# EAGLE board ATtinyBoard_3 (EAGLE 6.4)
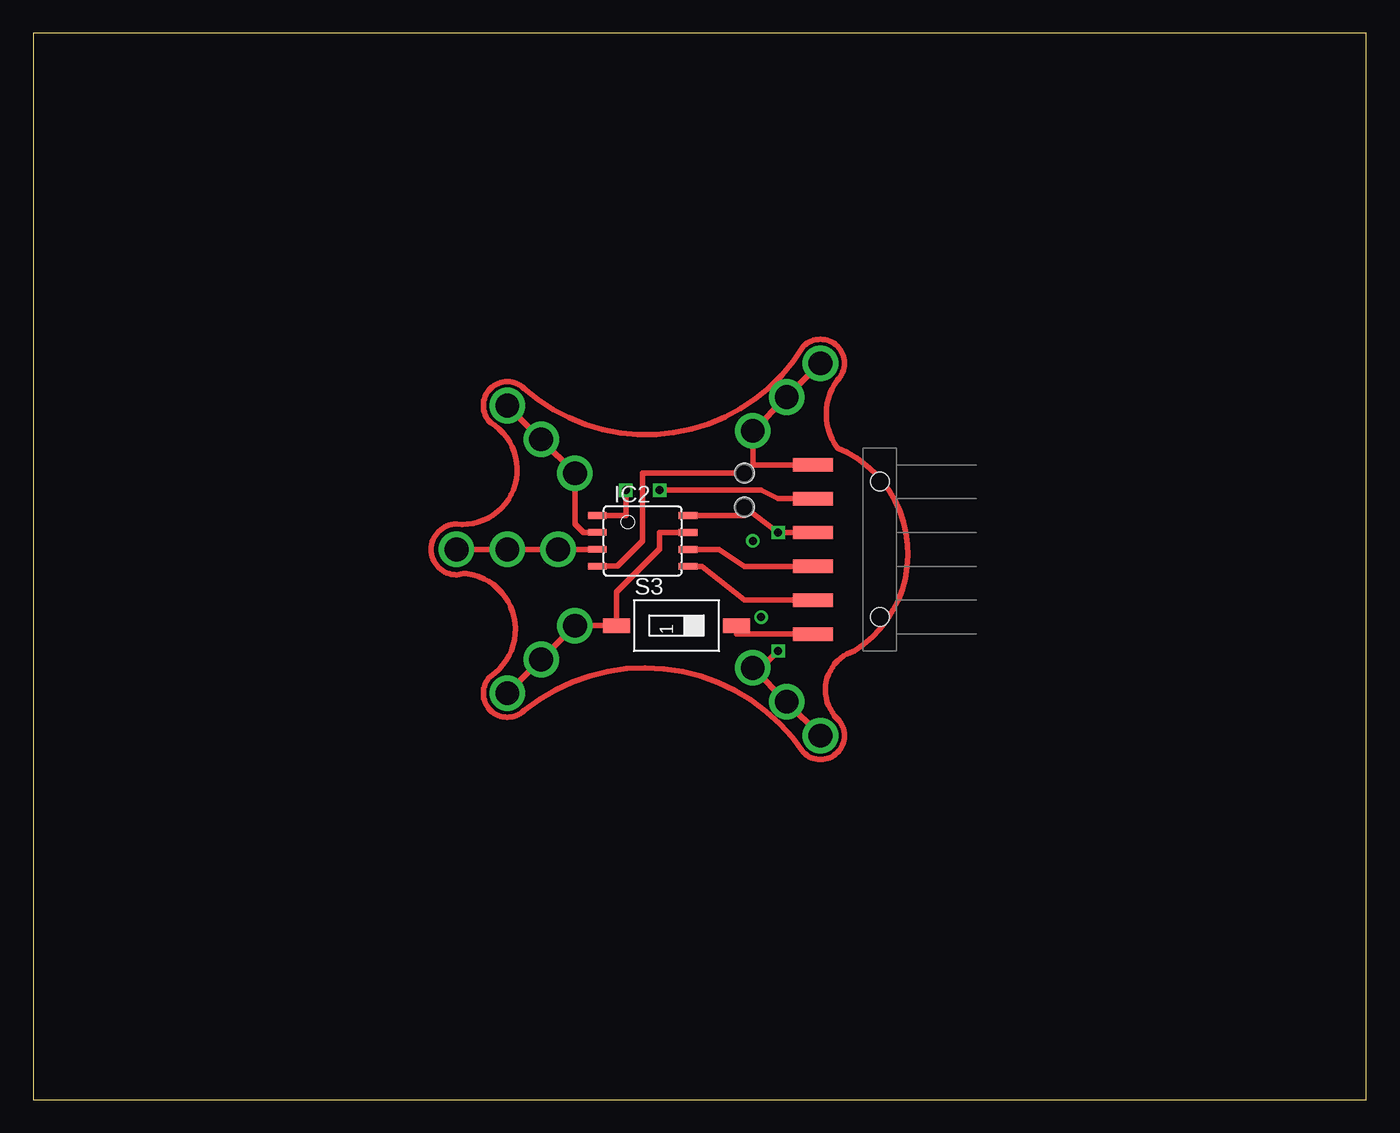
[diagram p0: board, top side]
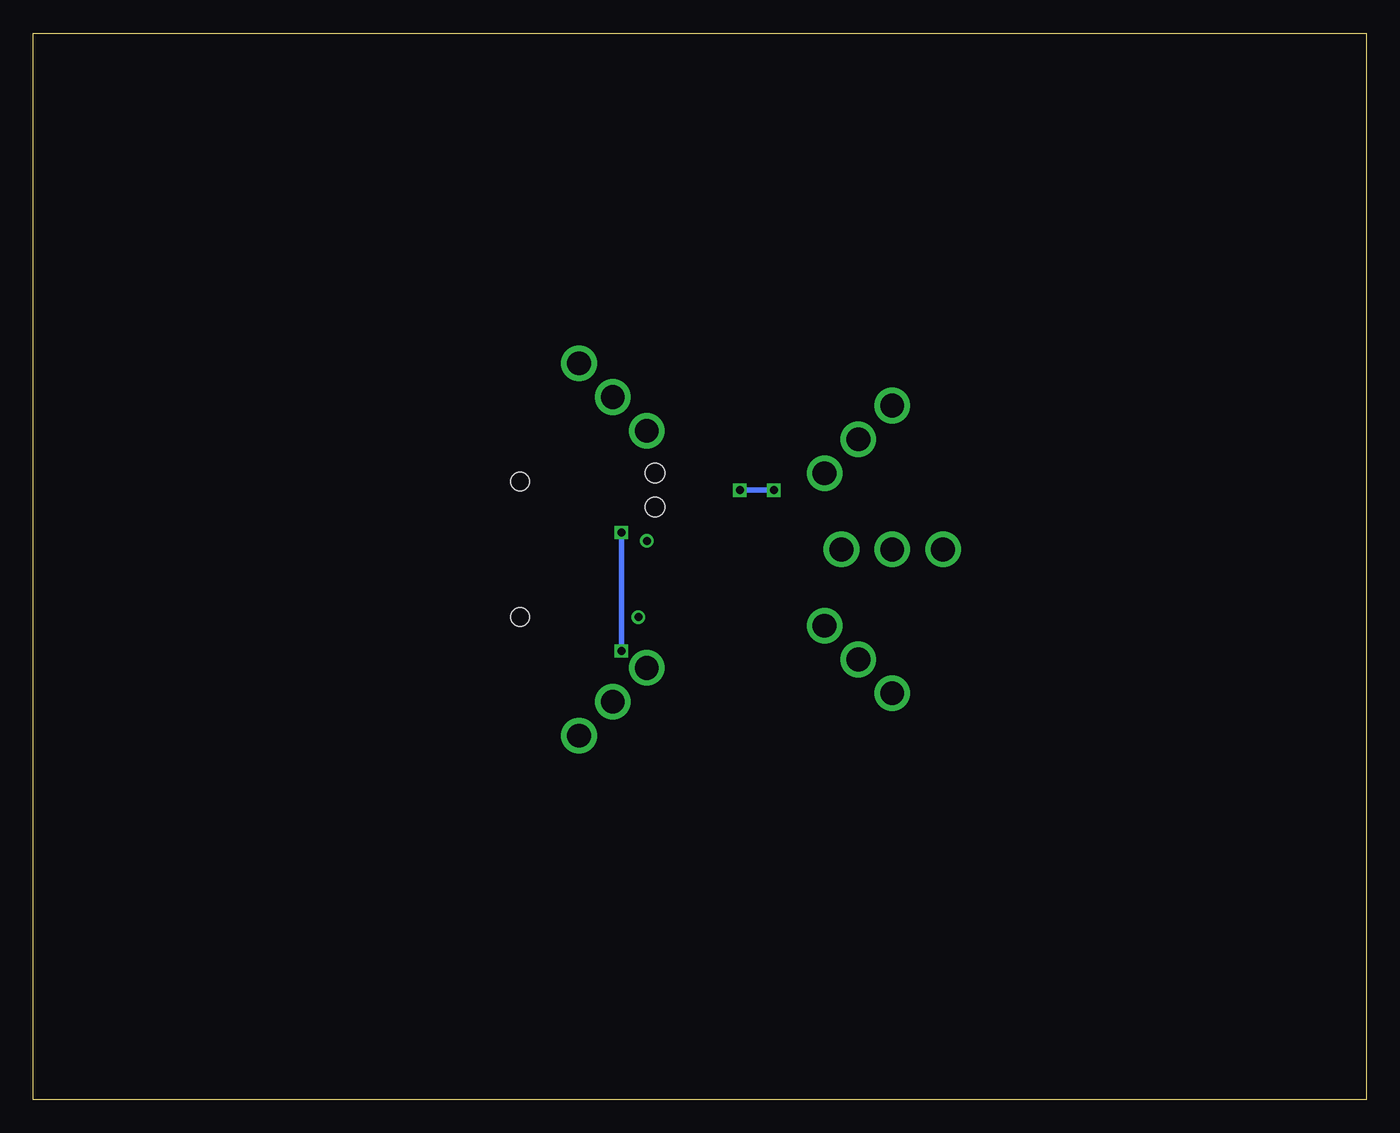
[diagram p1: board, bottom side, seen from below]

Size 100 x 80 mm. Coordinates in mm from the lower left corner, seen from the top.
Outline: 0,0 100,0 100,80 0,80 0,0
Copper layers (1*16): Top 0.035mm / dielectric 1.5mm / Bottom 0.035mm
Design rules "default": minimum track width 10mil, minimum drill 24mil, track to track 8mil, track to pad 8mil, pad to pad 8mil, via to via 8mil, smd to smd 8mil, copper to edge 40mil, drill to drill 8mil, minimum pad ring 10mil, minimum via ring 8mil, stop-mask expansion 4mil, vias tented up to drill 0mil, thermal gap 10mil

## Footprints (pad centres in the part's own frame; a part is rotated, then mirrored left to right if it is on the bottom)
SIMPLE_HOLE_SM = drill 1.778 pad 2.286: P$1 0,0
8S2 = smd 0.5 x 1.4: 1 -1.905,-3.404; 2 -0.645,-3.404; 3 0.625,-3.404; 4 1.895,-3.404; 5 1.905,3.404; 6 0.635,3.404; 7 -0.635,3.404; 8 -1.905,3.404
1X06-SMD = smd 1 x 3: 1 -6.35,5; 2 -3.81,5; 3 -1.27,5; 4 1.27,5; 5 3.81,5; 6 6.35,5 | hole 1.4: -5.08,0; 5.08,0
1X02_PP_HOLES_ONLY = drill 0.889 pad 0.813: 1 0,0; 2 2.54,0 | hole 1.473: 0,0; 2.54,0
SMS-001 = smd 1.092 x 2.007: 1 0,-4.496; 2 0,4.496

## Placement (x,y rotation side)
H1  SEW_HOLE-SMALL  [SIMPLE_HOLE_SM]  38.1,33.02 0 top
H2  SEW_HOLE-SMALL  [SIMPLE_HOLE_SM]  38.1,49.53 0 top
H3  SEW_HOLE-SMALL  [SIMPLE_HOLE_SM]  35.56,41.27 0 top
H4  SEW_HOLE-SMALL  [SIMPLE_HOLE_SM]  56.52,52.7 0 top
H5  SEW_HOLE-SMALL  [SIMPLE_HOLE_SM]  53.98,32.38 0 top
H6  SEW_HOLE-SMALL  [SIMPLE_HOLE_SM]  56.52,29.84 0 top
H7  SEW_HOLE-SMALL  [SIMPLE_HOLE_SM]  59.05,27.3 0 top
H8  SEW_HOLE-SMALL  [SIMPLE_HOLE_SM]  31.75,41.27 0 top
H9  SEW_HOLE-SMALL  [SIMPLE_HOLE_SM]  39.37,41.27 0 top
H10  SEW_HOLE-SMALL  [SIMPLE_HOLE_SM]  35.56,52.07 0 top
H11  SEW_HOLE-SMALL  [SIMPLE_HOLE_SM]  40.64,46.99 0 top
H12  SEW_HOLE-SMALL  [SIMPLE_HOLE_SM]  35.56,30.48 0 top
H13  SEW_HOLE-SMALL  [SIMPLE_HOLE_SM]  40.64,35.56 0 top
H14  SEW_HOLE-SMALL  [SIMPLE_HOLE_SM]  59.05,55.24 0 top
H15  SEW_HOLE-SMALL  [SIMPLE_HOLE_SM]  53.98,50.16 0 top
IC2  TINY13-20SU  [8S2]  45.72,41.91 270 top
ISP/FTDI-CONNECTOR  [1X06-SMD]  63.5,41.27 90 top
JP2  M02POGO_PIN_HOLES_ONLY  [1X02_PP_HOLES_ONLY]  53.34,46.99 270 top
S3  SWS001  [SMS-001]  48.26,35.56 270 top

## Library data of the parts
H1-H15 = LilyPad-Wearables
IC2 = atmel; MPN: ATTINY13-20SU; OC_FARNELL: 9171568; OC_NEWARK: 96K6522
ISP/FTDI-CONNECTOR JP2 = SparkFun-Connectors
S3 = smd-special

## Nets
GND: H4.P$1 H14.P$1 H15.P$1 IC2.4 ISP/FTDI-CONNECTOR.6 JP2.1
N$1: IC2.5 ISP/FTDI-CONNECTOR.2
N$2: H3.P$1 H8.P$1 H9.P$1 IC2.3
N$3: IC2.1 ISP/FTDI-CONNECTOR.5
N$4: IC2.6 ISP/FTDI-CONNECTOR.3
N$5: ISP/FTDI-CONNECTOR.1 S3.2
N$6: H2.P$1 H10.P$1 H11.P$1 IC2.2
N$7: H5.P$1 H6.P$1 H7.P$1 IC2.8 ISP/FTDI-CONNECTOR.4 JP2.2
N$8: H1.P$1 H12.P$1 H13.P$1 IC2.7 S3.1

## Tracks (layer width: path | path; a pad name or v marks a point on that pad's centre or on a via)
GND
  Top 0.406: IC2.4 43.83,40.02 45.72,41.91 45.72,46.99 JP2.1 53.98,47.62 | 53.98,47.62 ISP/FTDI-CONNECTOR.6 | 53.98,47.62 H15.P$1 H4.P$1 H14.P$1
N$1
  Top 0.406: IC2.5 50.16,40.01 53.34,37.47 ISP/FTDI-CONNECTOR.2
N$2
  Top 0.406: IC2.3 H3.P$1 H8.P$1 H9.P$1
N$3  (via drill 0.6)
  Top 0.406: ISP/FTDI-CONNECTOR.5 55.88,45.09 54.61,45.72 v46.99,45.72 | IC2.1 44.45,43.81 v44.45,45.72
  Bottom 0.406: v44.45,45.72 v46.99,45.72
N$4
  Top 0.406: IC2.6 51.44,41.27 53.34,40.01 ISP/FTDI-CONNECTOR.3
N$5
  Top 0.406: S3.2 52.76,34.92 ISP/FTDI-CONNECTOR.1
N$6
  Top 0.406: IC2.2 41.27,42.55 40.64,43.18 H11.P$1 H2.P$1 H10.P$1
N$7  (via drill 0.6)
  Top 0.406: IC2.8 53.34,43.81 JP2.2 v55.88,42.55 ISP/FTDI-CONNECTOR.4 | v55.88,33.66 54.61,32.38 H5.P$1 H6.P$1 H7.P$1
  Bottom 0.406: v55.88,42.55 v55.88,33.66
N$8
  Top 0.406: IC2.7 46.99,42.55 46.99,41.27 46.94,41.27 43.76,38.1 S3.1 H13.P$1 H1.P$1 H12.P$1
N$9  (via drill 0.6)
  other vias: 44.45,45.72 46.99,45.72 53.98,41.91 54.61,36.2
N$10
  Top 0.406: 60.33,28.57 arc-180 57.78,26.04 arc95 36.83,29.21 arc-180 34.29,31.75 arc131 33.02,39.37 arc31 31.75,39.37 arc-180 31.75,43.18 arc156 34.29,50.8 arc-180 36.83,53.34 arc100 57.78,56.52 arc-180 60.33,53.98 arc73 60.33,48.9 arc-125 61.59,33.66 arc118 60.33,28.57